# Altium PCB esp32_pico_d4_motor_driverV4.PcbDoc_2022-06-06.pcbdoc
Units mil, origin at the board's own origin, x right, y up, seen from the top; angles counter-clockwise.
Board outline 1120.05 x 1120.05 mil, 2 copper layers (Top Layer, Bottom Layer); 31 components, 53 nets, 163 pads, 42 vias.
Unrouted connection lines stored in the file: 1.
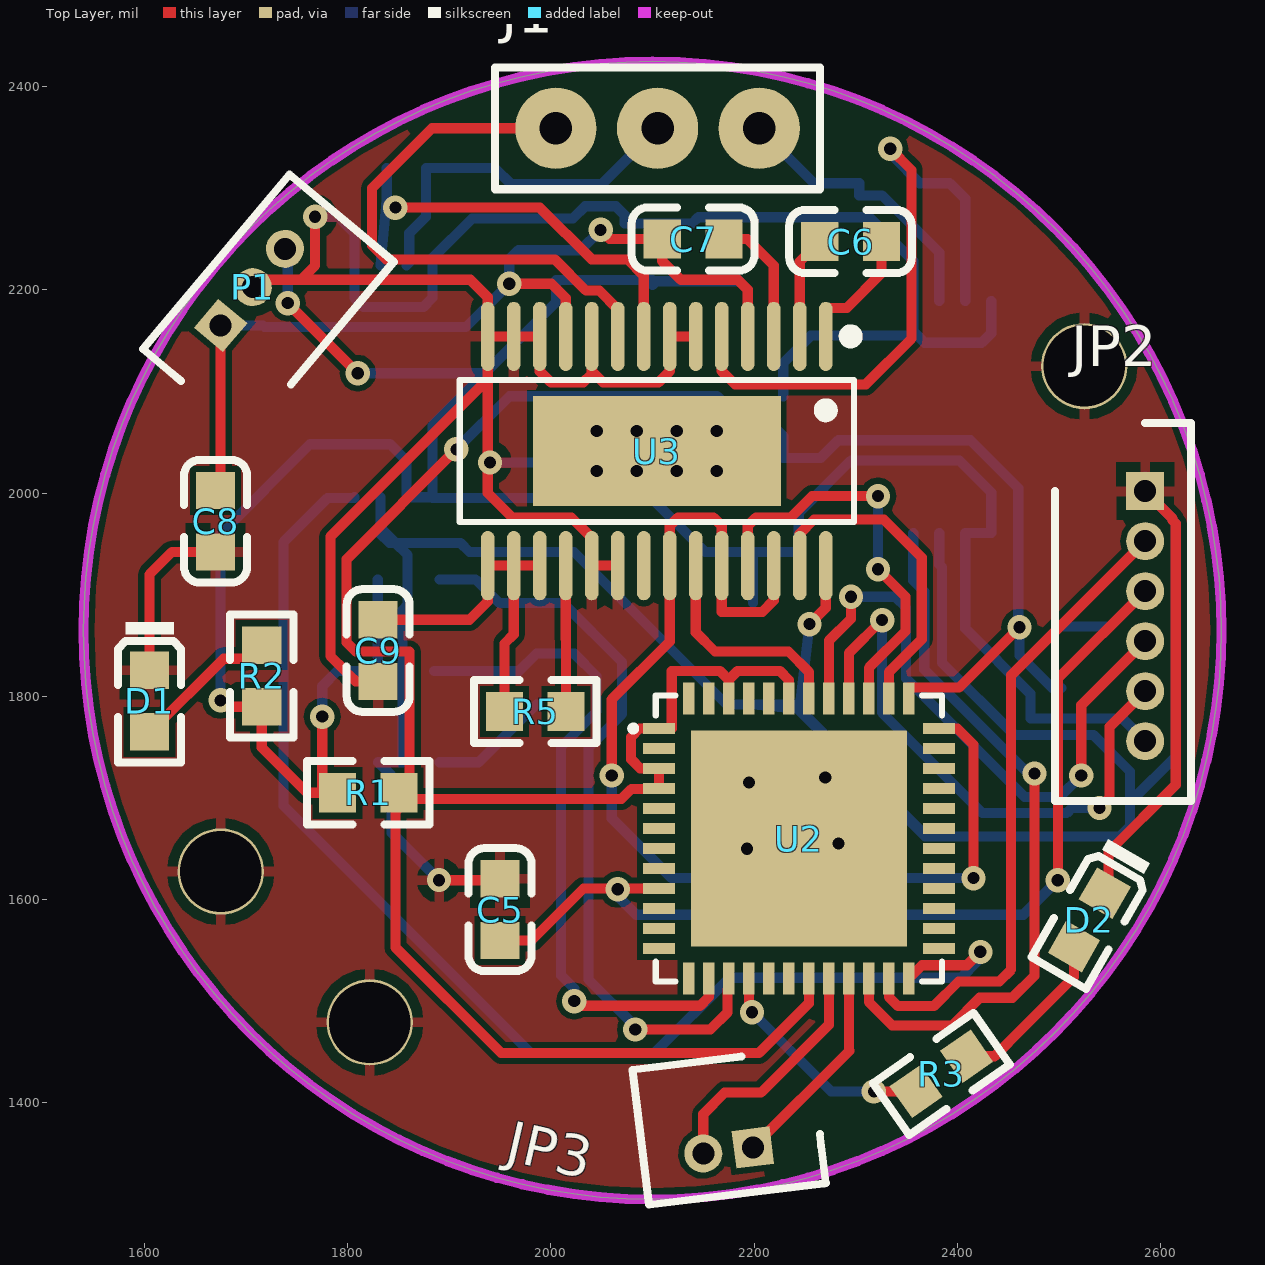
[diagram p0: Top Layer view]
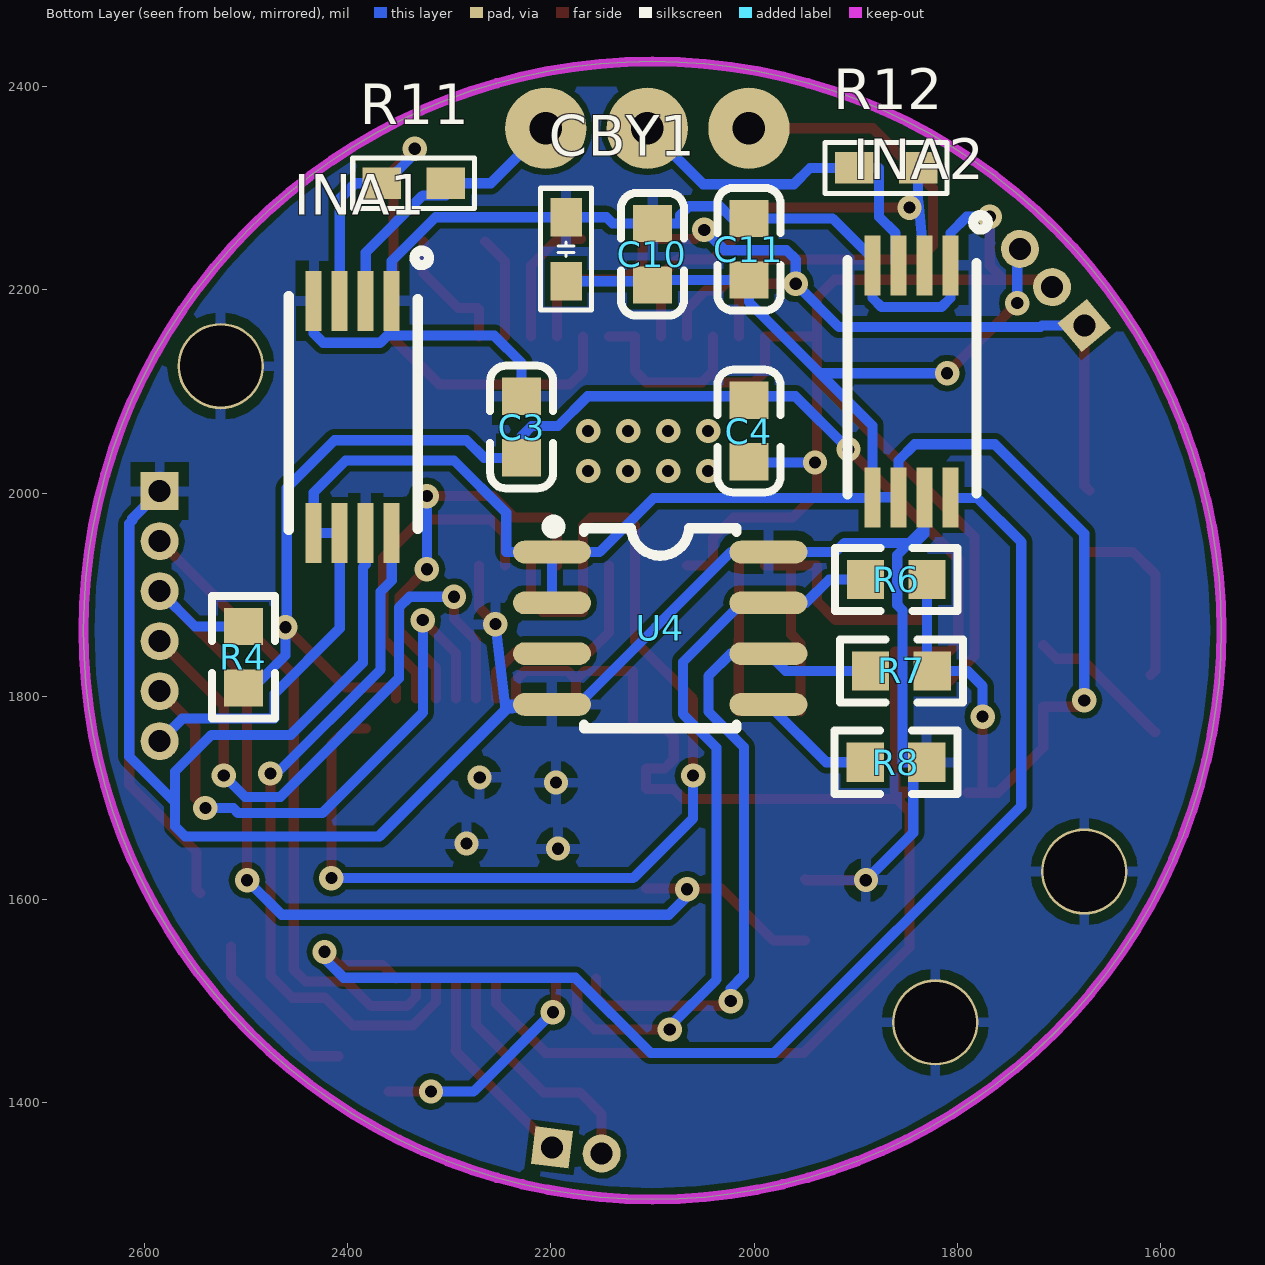
[diagram p1: Bottom Layer view, seen from below]

## Layer stack, top to bottom
Top Solder: solder mask 0.4, Solder Resist, Dk 3.5
Top Layer: signal copper 1.4
Dielectric1: dielectric 12.6, FR-4, Dk 4.8
Bottom Layer: signal copper 1.4
Bottom Solder: solder mask 0.4, Solder Resist, Dk 3.5

## Board outline
1539.98,1864.79 ccw(c2100,1864.79) 2100,1304.77 ccw(c2100,1864.79) 2660.02,1864.79 ccw(c2100,1864.79) 2100,2424.82 ccw(c2100,1864.79)

## Design rules (kind name [scope] priority, off if disabled: settings)
Clearance [All] p1: gap=6 ignorepadtopadclearanceinfootprint=FALSE
MinimumSolderMaskSliver [All] p1: minsoldermaskwidth=0
PolygonConnect [All] p1: connectstyle=Relief reliefconductorwidth=10 reliefentries=4 polygonreliefangle="90 Angle" airgapwidth=10
RoutingVias [All] p1: holewidth=12 width=24 viastyle="Through Hole" minholewidth=28 minwidth=50 maxholewidth=28 maxwidth=50
SilkToSilkClearance [All] p1: silktosilkclearance=0
SilkToSolderMaskClearance [IsPad] p1: minsilkscreentomaskgap=0 clearancetoexposedcopper=TRUE
SolderMaskExpansion [All] p1: expansion=4
Width [All] p1: maxlimit=10 minlimit=10 preferedwidth=10
27 further rules are at their usual default settings.

## Components (designator, comment, footprint, x,y, rotation, side; value= is the part's Value field where it differs from the comment)
C3 "10uF" 0603_C#1 2228.75,2065 r270 bottom
C4 "100nF" 0603_C#1 2005,2061.09 r90 bottom
C5 "1uF" 0603_C#1 1950,1590 r270 top
C6 "10nF" 0603_C#1 2295,2247.62 r0 top
C7 "100nF" 0603_C#1 2140,2250 r180 top
C8 "10uF" 0603_C#1 1670,1972.29 r90 top
C9 "1uF" 0603_C#1 1830,1845 r90 top
C10 "100nF" 0603_C#2 2100,2235 r90 bottom
C11 "10uF (106) 10% 10V" 0603_C#2 2005,2240 r90 bottom
CBY1 "0.1μF" 0603C 2185,2240 r90 bottom
D1 "蓝灯 0603" 0603_LED_S1 1605,1795.32 r270 top
D2 "蓝灯 0603" 0603_LED_S1 2530,1580 r240 top
INA1 "INA240A2" INA240 2395,2075 r0 bottom
INA2 "INA240A1" INA240 1845,2110 r0 bottom
J1 "90120-0763" 10.7MHZ 2205,2359.05 r180 top
JP2 "SPI1" SHDR6 2585,2001.85 r270 top
JP3 "Header 2" SHDR2 2198.85,1356 r7 top
P1 "TB002-500-03BE" SHDR3 1675,2165 r230 top
R1 "0Ω (0R0) ±1%" 0603_R#1 1820.32,1705 r180 top
R2 "2KΩ" 0603_R#1 1715.39,1820 r270 top
R3 "2KΩ" 0603_R#1 2384.36,1428.37 r215 top
R4 "10K" 0603_R#1 2502.57,1838.42 r270 bottom
R5 "10K" 0603_R#1 1984.68,1785 r0 top
R6 "10KΩ" 0603_R#2 1860,1915 r0 bottom
R7 "10K" 0603_R#2 1855,1825 r0 bottom
R8 "1K" 0603_R#2 1860.32,1735 r0 bottom
R11 "10mOhm" 0603R 2335,2305 r180 bottom
R12 "10mOhm" 0603R 1870,2320 r0 bottom
U2 "ESP32-PICO-D4" QFN-48_L7.0-W7.0-P0.50-BL-EP5.4 2255,1660 r270 top
U3 "DRV8313PWPR" HTSSOP-28_L9.8-W4.5-P0.65-LS6.6-BL-EP 2104.25,2041.77 r180 top
U4 "AS5600-ASOM" SOIC-8_L5.0-W4.0-P1.27-LS6.0-BL 2135,1840 r90 bottom

## Footprints (in the part's own frame and the unit in brackets; to place one, negate y for a bottom-side part, rotate by r counter-clockwise, add the part's x,y. Pads: shape width x height; smd on the part's side, far side on the other; paste and mask are expansions set on the pad)
10.7MHZ [mil]
  round 80 hole 32: 1(0,0) 2(200,0) 3(100,0)
  silkscreen extent -60,-60 260,60
0603_C#1 [mm]
  rect 0.93x0.98 smd: 1(-0.77,0) 2(0.77,0)
  silkscreen extent -1.53,-0.79 1.54,0.79
0603_C#2 [mm]
  rect 0.93x0.98 smd: 1(0.77,0) 2(-0.77,0)
  silkscreen extent -1.54,-0.79 1.53,0.79
0603_LED_S1 [mm]
  rect 0.93x0.98 smd: A(0.77,0) K(-0.77,0)
  silkscreen extent -1.98,-0.79 1.54,0.79
0603_R#1 [mm]
  rect 0.93x0.98 smd: 1(-0.77,0) 2(0.77,0)
  silkscreen extent -1.54,-0.79 1.54,0.79
0603_R#2 [mm]
  rect 0.93x0.98 smd: 1(0.77,0) 2(-0.77,0)
  silkscreen extent -1.54,-0.79 1.54,0.79
0603C [mil]
  rect 38x31 smd: 1(-31.5,0) 2(31.5,0)
  silkscreen extent -60,-25 60,25
0603R [mil]
  rect 38x31 smd: 1(-31.5,0) 2(31.5,0)
  silkscreen extent -60,-25 60,25
HTSSOP-28_L9.8-W4.5-P0.65-LS6.6-BL-EP [mm]
  oval 0.343x1.731 smd: 1(-4.225,-2.856) 2(-3.575,-2.856) 3(-2.925,-2.856) 4(-2.275,-2.856) 5(-1.625,-2.856) 6(-0.975,-2.856) 7(-0.325,-2.856) 8(0.325,-2.856) 9(0.975,-2.856) 10(1.625,-2.856) 11(2.275,-2.856) 12(2.925,-2.856) 13(3.575,-2.856) 14(4.225,-2.856) 15(4.225,2.875) 16(3.575,2.875) 17(2.925,2.875) 18(2.275,2.875) 19(1.625,2.875) 20(0.975,2.875) 21(0.325,2.875) 22(-0.325,2.875) 23(-0.975,2.875) 24(-1.625,2.875) 25(-2.275,2.875) 26(-2.925,2.875) 27(-3.575,2.875) 28(-4.225,2.875)
  rect 6.2x2.75 smd: 29(0,0.009)
  silkscreen extent -5,-3.01 4.93,1.78
INA240 [mm]
  rect 0.4x1.5 smd mask+0.05: 1(-0.975,-2.9) 2(-0.325,-2.9) 3(0.325,-2.9) 4(0.975,-2.9) 5(0.975,2.9) 6(0.325,2.9) 7(-0.325,2.9) 8(-0.975,2.9)
  silkscreen extent -1.91,-4.16 1.6,2.82, body extent -1.5,-3.3 1.5,3.3, height 1.2
QFN-48_L7.0-W7.0-P0.50-BL-EP5.4 [mm]
  rect 0.28x0.8 smd: 1(-2.75,-3.778) 2(-2.25,-3.778) 3(-1.75,-3.778) 4(-1.25,-3.778) 5(-0.75,-3.778) 6(-0.25,-3.778) 7(0.25,-3.778) 8(0.75,-3.778) 9(1.25,-3.778) 10(1.75,-3.778) 11(2.25,-3.778) 12(2.75,-3.778) 25(2.75,3.222) 26(2.25,3.222) 27(1.75,3.222) 28(1.25,3.222) 29(0.75,3.222) 30(0.25,3.222) 31(-0.25,3.222) 32(-0.75,3.222) 33(-1.25,3.222) 34(-1.75,3.222) 35(-2.25,3.222) 36(-2.75,3.222)
  rect 0.8x0.28 smd: 13(3.5,-3.028) 14(3.5,-2.527) 15(3.5,-2.028) 16(3.5,-1.527) 17(3.5,-1.028) 18(3.5,-0.527) 19(3.5,-0.028) 20(3.5,0.473) 21(3.5,0.972) 22(3.5,1.473) 23(3.5,1.972) 24(3.5,2.473) 37(-3.5,2.473) 38(-3.5,1.972) 39(-3.5,1.473) 40(-3.5,0.972) 41(-3.5,0.473) 42(-3.5,-0.028) 43(-3.5,-0.527) 44(-3.5,-1.028) 45(-3.5,-1.527) 46(-3.5,-2.028) 47(-3.5,-2.527) 48(-3.5,-3.028)
  rect 5.4x5.4 smd: 49(0,-0.277)
  silkscreen extent -3.58,-4.49 3.58,3.3
SHDR2 [mm]
  rect 0.95x0.95 hole 0.55: 1(0,0)
  round 0.95 hole 0.55: 2(-1.25,0)
  silkscreen extent -2.75,-1.11 1.7,2.29
SHDR3 [mm]
  rect 0.95x0.95 hole 0.55: 1(0,0)
  round 0.95 hole 0.55: 2(-1.25,0) 3(-2.5,0)
  silkscreen extent -4,-1.11 1.7,2.29
SHDR6 [mm]
  rect 0.95x0.95 hole 0.55: 1(0,0)
  round 0.95 hole 0.55: 2(1.25,0) 3(2.5,0) 4(3.75,0) 5(5,0) 6(6.25,0)
  silkscreen extent -1.7,-2.25 7.75,1.15
SOIC-8_L5.0-W4.0-P1.27-LS6.0-BL [mil]
  oval 22.38x76.78 smd: 1(101.98,63.89) 2(51.98,63.89) 3(1.98,63.89) 4(-48.02,63.89) 5(-48.02,-149.11) 6(1.98,-149.11) 7(51.98,-149.11) 8(101.98,-149.11)
  silkscreen extent -71,-118 133,68

## Part data
CBY1: library part CAP_1
INA1 INA2: library part INA240
JP2: library part "HEADER 6"
JP3: "Header, 2-Pin"
R11: library part RES2
R12: library part Res1, "Resistor"

## Free pads (board coordinates)
  round 85 hole 80: 8(1675,1627.51) 8(1821.72,1479.02) 8(2525,2125)

## Via types
v1: diameter 24, hole 12, Top Layer to Bottom Layer, 27 vias
v2: diameter 24, hole 12, Top Layer to Bottom Layer, tented both sides, 8 vias
v3: diameter 23.62, hole 12, Top Layer to Bottom Layer, 7 vias

## Nets (pads, with @x,y where several pads share a name; then routed paths per layer and width w, separated by ;. In a path a pad name is that pad's centre, name@x,y a point inside that pad or via, vN(x,y) a via of type N, cw(c..) or ccw(c..) an arc to the next point about the centre after c; other vN are vias at no path point)
EN: C5.2 JP2.3 R4.1 U2.9 | length 1055.9
  Top Layer w10: C5.2 1981,1559.69 2032.11,1610.79 2080,1610.79 U2.9 ; v1(2499,1619) 2499,1817.42 JP2.3
  Bottom Layer w10: v1(2065.86,1610) 2065.86,1603.14 2084,1585 2465,1585 v1(2499,1619) ; R4.1 2550.31,1868.74 JP2.3
ENA: U2.36 U3.22 U3.24 U3.26 | length 1097
  Top Layer w10: v1(2060,1722) 2060,1796.95 2117.05,1854 U3.22 2117.05,1968 2125.05,1976 2160.23,1976 2168.23,1968 U3.24 2168.23,1883 2208,1883 2219.41,1894.41 U3.26 ; U2.36 2400,1768.27 2416,1752.27 v1(2416,1621)
  Bottom Layer w10: v1(2060,1722) 2060,1680 2119,1621 v1(2416,1621)
FLASH_CLK: U2.31
FLASH_CS: U2.25
FLASH_SD0: U2.27
FLASH_SD1: U2.33
FLASH_SD2: U2.30
FLASH_SD3: U2.32
GND: C3.1 C4.1 C5.1 C8.1 C9.1 C10.1 C11.1 CBY1.2 D1.K D2.K INA1.1 INA1.4 INA1.7 INA2.1 INA2.4 INA2.7 JP2.1 P1.2 pad.8 R8.2 U2.49 U3.6 U3.7 U3.10 U3.12 U3.13 U3.14 U3.19 U3.20 U3.28 U4.4 U4.8 | length 5704.8
  Top Layer w10: D1.K@1609.63,1821 D1.K 1605,1920 1626.98,1941.98 C8.1 ; P1.2 1718.06,2202.7 1718.06,2210 1754,2210 ; v1(1768,2272) 1768,2224 1754,2210 ; 1797.06,1825.63 1783,1839.69 1783,1957.09 1937.91,2112 ; 1801.68,1821 1808,1814.69 C9.1 ; v3(1890,1619) 1948.68,1619 C5.1 ; U3.10 2040.27,2120 ; U3.20 U3.19 2040.27,1955.91 2020.18,1976 1961.91,1976 1937.91,2000 1937.91,2112 ; U3.6 U3.7 2117.05,2120 2106.05,2109 2051.27,2109 2040.27,2120 ; v1(2254.59,1871) 2270.59,1887 U3.28 ; D2.K 2548.78,1609.88 2548.78,1646.75 2615,1712.97 2615,1970 2612,1973 2612,1974.85 JP2.1 ; 1754,2210 1920.7,2210 1937.91,2192.79 U3.14 ; 1937.91,2112 U3.14 ; U3.14 U3.13 U3.12 1989.09,2119.91 2000,2109 2032,2109 2040.27,2117.27 2040.27,2120
  Bottom Layer w10: v1(1768,2272) 1790.61,2272 1806.61,2256 INA2.1 1806.61,2192 1815.61,2183 1874.39,2183 1883.39,2192 INA2.4 1883.39,2231 1922.7,2270.31 C11.1 2021.71,2270.31 2033.77,2282.37 2064,2282.37 2072.77,2273.6 2072.77,2265.31 C10.1 2139,2265.31 2145.19,2271.5 CBY1.2 2313.5,2271.5 2356.61,2228.39 INA1.1 2356.61,2159.39 ; INA2.7 1832.2,1965.8 ; v3(1890,1619) 1843.31,1665.69 1843.31,1721.69 R8.2 1854,1735 1854,1885 1859,1890 1859,1939 1847,1951 ; v3(1940,2030) 2004.22,2030 C4.1 ; C3.1 2228.75,2128 2255.75,2155 2356.61,2155 2356.61,2159.39 ; v1(2254.59,1871) 2244.54,1787.44 ; INA1.7 2382.2,1929.8 2385,1927 2385,1833 2456,1762 2534,1762 2570,1726 2570,1672 2560,1662 2369.98,1662 ; INA1.4 2433.39,2157.39 2424,2148 2368,2148 2356.61,2159.39 ; 2571.89,1697.59 2615,1740.69 2615,1970 2612,1973 2612,1974.85 JP2.1 JP2.1@2585,2016.39 ; 1832.2,1965.8 1847,1951 ; 1832.2,1965.8 1832.2,1960 1841.2,1951 1847,1951 ; 1847,1951 1910.98,1951 1920,1941.98 U4.8 2022.81,1941.98 2172.81,1791.98 U4.4 ; U4.4 2238.18,1788.07 2242.95,1787.6 ; U4.4 2238.57,1791.98 ; 2238.57,1791.98 2242.95,1787.6 ; 2238.57,1791.98 2240,1791.98 2244.54,1787.44 ; 2242.95,1787.6 2244.54,1787.44 ; 2242.95,1787.6 2368.55,1662 2369.98,1662 ; 2244.54,1787.44 2369.98,1662
  other v3: 2193,1650 2282.97,1655.01 2195,1715 2270,1720
GPIO0: JP2.2 U2.23 | length 633.5
  Top Layer w10: U2.23 2332.66,1504 2341.66,1495 2377,1495 2401.22,1519.22 2441.3,1519.22 2453,1530.92 2453,1820.64 JP2.2
GPIO2: INA1.8 U2.22 | length 704.8
  Top Layer w10: U2.22 2312.98,1499.02 2336,1476 2395,1476 2422.22,1503.22 2454.22,1503.22 2476,1525 v1(2476,1724)
  Bottom Layer w10: INA1.8 2356.61,1914.02 2367.59,1903.05 2367.59,1826.41 2470,1724 v1(2476,1724)
GPIO4: INA2.8 U2.24 | length 1270.4
  Top Layer w10: U2.24 2365.35,1535.22 2409.41,1535.22 v3(2422.66,1548.47)
  Bottom Layer w10: INA2.8 1806.61,1995 1780,1995 1737,1952 1737,1692 1980,1449 2102,1449 2176,1523 2404,1523 v3@2420,1539 ; v3@2420,1548.47 v3@2420,1539 ; v3(2422.66,1548.47) 2422.66,1541.66 v3@2420,1539
GPIO5: U2.34
GPIO9: U2.28
GPIO10: U2.29
GPIO12: U2.18
GPIO13: JP3.2 U2.20 | length 244.3
  Top Layer w10: JP3.2 2150,1388.77 2171.23,1410 2206.95,1410 2273.61,1476.65 U2.20
GPIO14: U2.17
GPIO15: JP3.1 U2.21 | length 205.9
  Top Layer w10: JP3.1 2294,1451.15 2293.29,1451.87 U2.21
GPIO18: U2.35
GPIO19: U2.38 U3.27 | length 324.9
  Top Layer w10: U3.27 2245,1960 2259,1974 2327.61,1974 2365,1936.61 2365,1856 2332.66,1823.66 U2.38
GPIO21: U2.42 U3.23 | length 219.2
  Top Layer w10: U3.23 2142.64,1863 2161.64,1844 2233.92,1844 2253.92,1824 U2.42
GPIO22: U2.39 U3.25 | length 404.9
  Top Layer w10: U3.25 2193.82,1968 2201.82,1976 2236,1976 2257,1997 v1(2322,1997) ; U2.39 2312.98,1827.98 2349,1864 2349,1898.02 v1(2322,1925.02)
  Bottom Layer w10: v1(2322,1925.02) v1(2322,1997)
GPIO25: R7.1 U2.14 U4.6 | length 671.8
  Top Layer w10: v1(2023.02,1500) 2027.57,1495.45 2146.95,1495.45 2155.5,1504 U2.14
  Bottom Layer w10: R7.1 1968.91,1825 U4.6 2023.02,1841.98 2045,1820 2045,1785 2010,1750 2010,1525.45 2023.02,1512.43 v1(2023.02,1500)
GPIO26: R6.1 U2.15 U4.7 | length 740.3
  Top Layer w10: v1(2083,1472) 2157,1472 2174.02,1489.02 2174.02,1511.45 2175.18,1511.45 U2.15
  Bottom Layer w10: R6.1 1926,1915 1949.02,1891.98 U4.7 2011.81,1891.98 2070,1833.79 2070,1782.43 2037,1749.43 2037,1521.08 2083,1475.08 v1(2083,1472)
GPIO27: R3.2 U2.16 | length 228.3
  Top Layer w10: U2.16 2194.87,1492.13 v1(2198,1489) ; v1(2318,1410.98) R3.2
  Bottom Layer w10: v1(2198,1489) 2276.02,1410.98 v1(2318,1410.98)
GPIO32: U2.12
GPIO33: U2.13
GPIO34: U2.10
GPIO35: U2.11
GPIO37: U2.7
GPIO38: U2.6
NetC6_1: C6.1 U3.2 | length 101.5
  Top Layer w10: U3.2 2245,2227.93 C6.1
NetC6_2: C6.2 U3.1 | length 127.2
  Top Layer w10: U3.1 2270.59,2180.61 2272.21,2182.23 2291.23,2182.23 2325.32,2216.32 C6.2
NetC7_1: C7.1 U3.3 | length 129.6
  Top Layer w10: C7.1 2193.41,2250 2219.41,2224 U3.3
NetC9_2: C9.2 R5.1 U3.15 U3.16 U3.17 | length 349.2
  Top Layer w10: C9.2 1920,1875.32 1937.91,1893.23 U3.15 U3.16 ; R5.1 1954.37,1852 1963.5,1861.13 U3.16 ; U3.17 U3.16
NetD1_A: D1.A R2.1 | length 145.7
  Top Layer w10: D1.A 1605.98,1765 1677.99,1837 1702.09,1837 R2.1
NetD2_A: D2.A R3.1 | length 180.4
  Top Layer w10: R3.1 2436.75,1445.75 2464.92,1473.92 2486.67,1495.67 2514.84,1523.84 D2.A D2.A@2514.84,1541.21
NetR5_2: R5.2 U3.18 | length 143.7
  Top Layer w10: U3.18 2014.68,1856.32 2015,1856 R5.2
NetR8_1: R8.1 U4.5 | length 118.9
  Bottom Layer w10: R8.1 1928.91,1735 U4.5
NetU2_2: U2.2
RXD: JP2.5 U2.40 | length 572.5
  Top Layer w10: U2.40 2293.29,1842.29 v1(2326,1875) ; v1(2540,1690) 2550,1700 2550,1770 JP2.5
  Bottom Layer w10: v1(2326,1875) 2326,1783.9 2424.9,1685 2507.63,1685 2512.63,1690 v1(2540,1690)
SENSOR_VN: U2.8
SENSOR_VP: U2.5
TXD: JP2.4 U2.41 | length 625.4
  Top Layer w10: U2.41 2273.61,1854.61 2295.38,1876.38 v1(2295.38,1898.02) ; v1(2522,1722) 2522,1791.21 JP2.4
  Bottom Layer w10: v1(2295.38,1898.02) 2338.98,1898.02 2349.57,1887.43 2349.57,1817.61 2466.17,1701 2501,1701 v1(2522,1722)
U: INA1.2 J1.1 R11.2 | length 282.5
  Bottom Layer w10: J1.1 2259.05,2305 R11.2 2303.5,2293 2326,2293 2382.2,2236.8 INA1.2
U_CS: INA1.3 R11.1 U3.5 | length 638.4
  Top Layer w10: U3.5 2168.23,2120 2181.23,2107 2310,2107 2355,2152 2355,2318 v1(2334,2339)
  Bottom Layer w10: v1(2334,2339) 2336.68,2336.32 2336.68,2331.32 2363,2305 R11.1 2392.52,2305 2407.8,2289.73 INA1.3
V: INA2.3 J1.3 R12.2 | length 361.2
  Bottom Layer w10: INA2.3 1860.67,2227.05 1860.67,2255.67 1877,2272 1877,2320 R12.2 1945,2320 1961,2304 2049.95,2304 J1.3
V_CS: INA2.2 R12.1 U3.8 | length 440.1
  Top Layer w10: v1(1847,2281) 1989.2,2281 2040.2,2230 2075.46,2230 2091.46,2214 U3.8
  Bottom Layer w10: INA2.2 1837.77,2281.89 1838.5,2289.5 ; R12.1 1838.5,2289.5 ; v1(1847,2281) 1838.5,2289.5
VDD3V3: C10.2 C11.2 CBY1.1 INA1.5 INA1.6 INA2.5 INA2.6 JP2.6 P1.3 R1.2 R2.2 R6.2 R7.2 U4.1 U4.2 | length 2701.5
  Top Layer w10: v1(1675,1796) 1681.32,1789.68 R2.2 1715.39,1749.61 1760,1705 R1.2@1775,1705 ; v1(1741,2187) v1(1810,2118) ; v1(1775,1780) R1.2@1775,1705 ; R1.2 R1.2@1775,1705
  Bottom Layer w10: v1(1675,1796) 1675,1960 1763,2048 1841.8,2048 1857.8,2032 INA2.6 INA2.5 ; P1.3 1741,2237.66 v1(1741,2187) ; v1(1775,1780) 1775,1810 1790,1825 R7.2 1829.68,1830 R6.2 ; v1(1810,2118) 1935.03,2118 ; CBY1.1 2103.82,2208.5 C10.2 2100,2209.68 C11.2 2005,2187.97 1935.03,2118 ; U4.2 U4.1 ; JP2.6 2562.79,1778 2472,1778 2472,1802.64 2407.8,1866.84 INA1.6 INA1.5 2433.39,2000.61 2402,2032 2295.28,2032 2243.98,1980.7 2243.98,1941.98 U4.1 ; INA2.5 1883.39,2066.36 1935.03,2118 ; INA2.5 1883.39,1995 2098.98,1995 2152,1941.98 U4.1
VDD33: C3.2 C4.2 R1.1 R4.2 U2.1 U2.3 U2.4 U2.19 U2.37 U2.43 U2.46 | length 2687
  Top Layer w10: R1.1 1850.63,1706 1861,1706 1861,1844 1808,1844 1799,1853 1799,1935 v1(1907,2043) ; R1.1@1856.63,1699 2069.53,1699 2079.23,1708.7 2105.76,1708.7 U2.4 U2.3 2088,1728.9 2079,1737.9 2079,1760 2087.27,1768.27 U2.1 2119,1768.27 2119,1825 2166.18,1825 2175.18,1816 ; R1.1@1858.13,1697.5 1847,1686.37 1847,1553 1951,1449 2205,1449 2253.92,1497.92 U2.19 ; U2.46 2175.18,1816 ; U2.43 2234.24,1816 2225.24,1825 2184,1825 2175.18,1816.18 2175.18,1816 ; U2.37 2352.35,1808.55 2401.78,1808.55 v1(2461.23,1868)
  Bottom Layer w10: v1(1907,2043) 1959.32,2095.32 2030,2095.32 2163.68,2095.32 2193,2066 2218.75,2066 2228.75,2056 C3.2 2265.65,2034.68 2282.97,2052 2413,2052 2460,2005 2460,1868 v1(2461.23,1868) 2461.23,1840.41 2493.53,1808.11 R4.2
VIN: C7.2 C8.2 P1.1 U3.4 U3.11 | length 919.7
  Top Layer w10: C8.2 1675,2007.61 P1.1 ; v1(1959,2206) 2000.68,2206 2014.68,2192 U3.11 ; v1(2049,2259) 2058,2250 C7.2 2109.69,2228.31 2128,2210 2184,2210 2193.82,2200.18 U3.4
  Bottom Layer w10: P1.1 1716.61,2165 1718.06,2163.55 1916.55,2163.55 v1(1959,2206) 1959,2230 1968,2239 2029,2239 v1(2049,2259)
W: J1.2 U3.9 | length 556.2
  Top Layer w10: J1.2 1883.05,2359.05 1824,2300 1824,2244 1838,2230 2003.77,2230 2034.45,2199.31 2047.62,2199.31 2065.86,2181.08 U3.9
pads on no net: U2.26 U2.44 U2.45 U2.47 U2.48 U3.21 U3.29 U4.3
copper on no net:
  other v2: 2045.19,2021.72 2084.56,2021.72 2123.93,2021.72 2163.3,2021.72 2045.19,2061.09 2084.56,2061.09 2123.93,2061.09 2163.3,2061.09

## Polygon pours and split planes (outlines as drawn)
GND on Top Layer "Top Layer-GND 1" (solid, remove dead copper, pour order 6): 1520,2415 2670,2415 2670,1280 1515,1280 1510,1285
GND on Bottom Layer "Bottom Layer-GND 1" (solid, remove dead copper, pour order 4): 1515,2425 1540,2400 2665,2400 2665,1295 2655,1285 1515,1285

## Keep-outs
Keep-Out Layer:
  circle w10: c2100,1864.79 r560.02

## Silkscreen, mask and mechanical layers (free items; w line width, h text height)
Document:
  lines w10: 1594.12,2400 1595,2400